# Altium PCB ver4.0.PcbDoc (part 2 of 2)
Units mil, origin at the board's own origin, x right, y up, seen from the top; angles counter-clockwise.
Board outline 2300 x 3750 mil, 2 copper layers (Top Layer, Bottom Layer); 43 components, 35 nets, 213 pads, 55 vias.
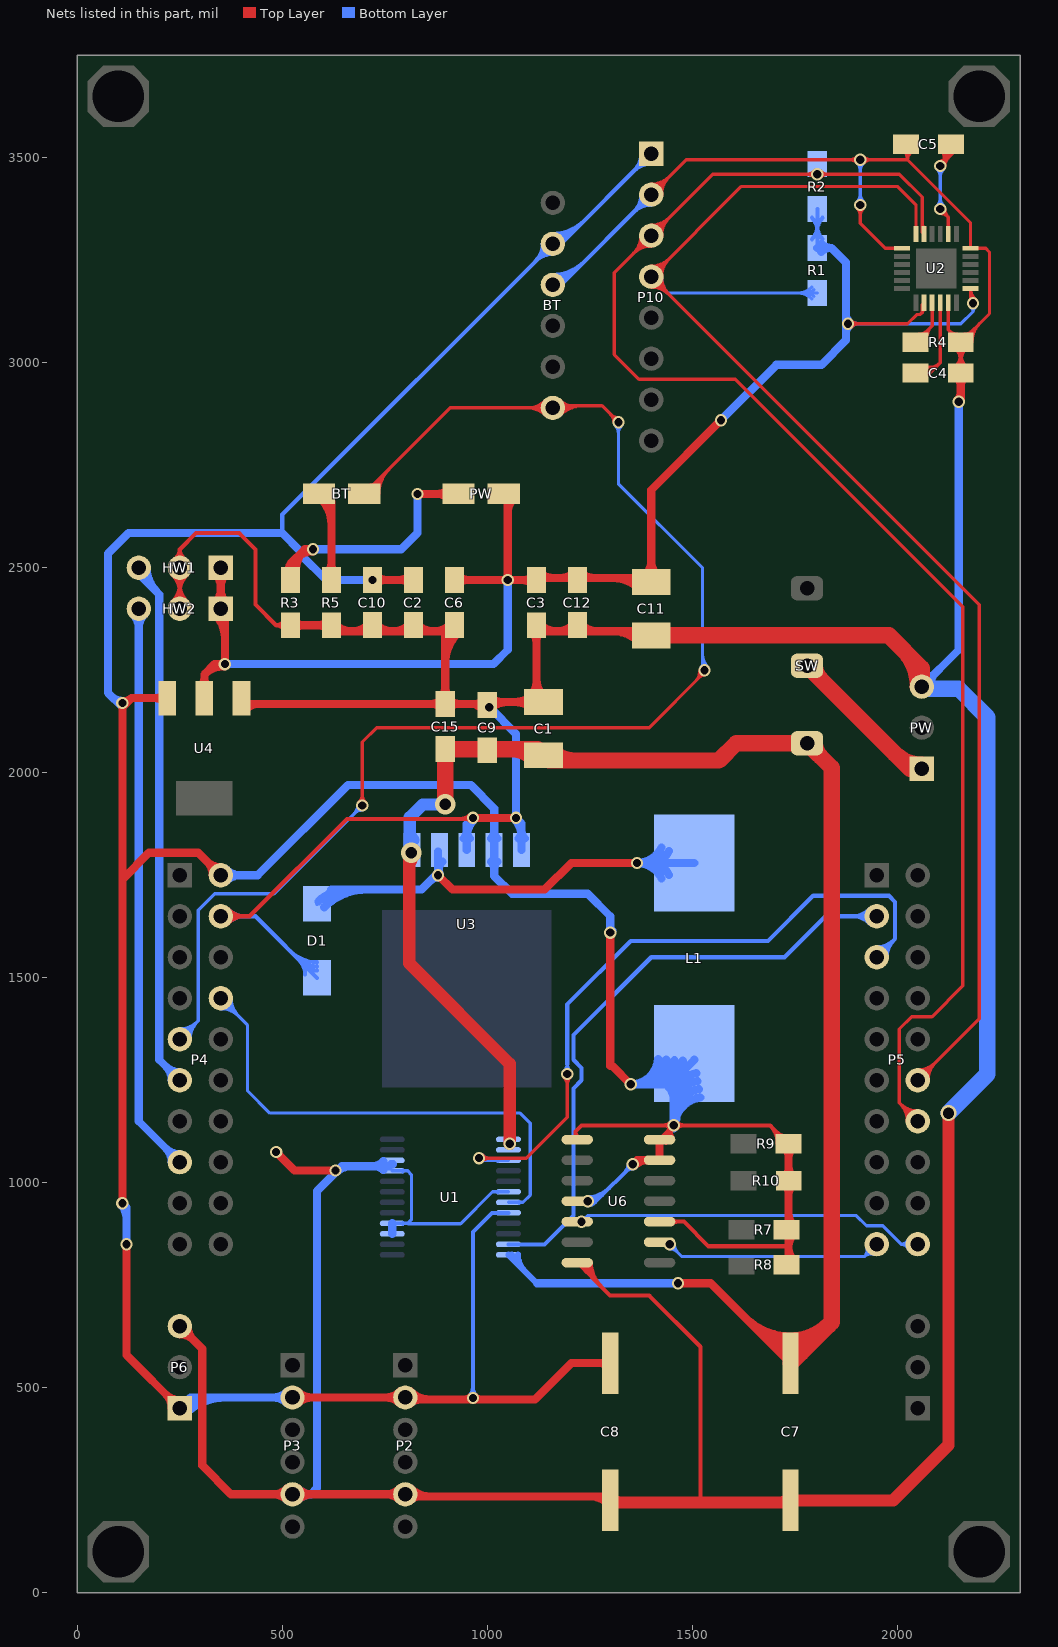
[diagram p2: the nets of this part, all layers, seen from the top]

## Via types
v1: diameter 30, hole 20, Top Layer to Bottom Layer, 52 vias
v2: diameter 50, hole 28, Top Layer to Bottom Layer, 2 vias
v3: diameter 40, hole 28, Top Layer to Bottom Layer, 1 vias

## Nets (pads, with @x,y where several pads share a name; then routed paths per layer and width w, separated by ;. In a path a pad name is that pad's centre, name@x,y a point inside that pad or via, vN(x,y) a via of type N, cw(c..) or ccw(c..) an arc to the next point about the centre after c; other vN are vias at no path point) (continued)
GND: BT.4 C1.2 C2.1 C3.2 C4.1 C5.1 C6.1 C7.2 C8.2 C9.1 C10.1 C11.2 C12.1 C15.2 D1.1 HW1.2 HW2.2 P2.5 P3.5 P4.4 P6.3@250,650 P10.2 PW.3 R3.2 R4.1 R5.2 U1.3 U1.4 U1.9 U1.10 U1.18 U2.1 U2.11 U2.18 U3.3 U3.5 U4.1 U6.7 | length 19056
  Top Layer w8: P10.2@1400,3410 1485,3495 v1(1910,3495) 2025,3495 ; P10.2@1400,3427.53 ccw(c1400,3469.84) 1429.92,3439.92 ccw(c1459.84,3410) P10.2@1417.53,3410 ; P10.2@1400,3435.53 ccw(c1400,3497.16) 1443.58,3453.58 ccw(c1487.16,3410) P10.2@1425.53,3410 ; v1@1902.22,3377.22 cw(c1883.44,3358.44) 1910,3358.44 cw(c1936.56,3358.44) v1@1917.78,3377.22 ; v1@1902.22,3487.22 ccw(c1883.44,3468.44) 1883.44,3495 ccw(c1883.44,3521.56) v1@1902.22,3502.78 ; v1@1917.78,3487.22 cw(c1936.56,3468.44) 1936.56,3495 cw(c1936.56,3521.56) v1@1917.78,3502.78 ; v1@1920,3385 v1(1910,3385) 1910,3340 1970.79,3279.21 U2.1@2011.34,3279.21 ; C5.1@2015,3519.13 cw(c1990.85,3494.98) 2025,3494.98 ; 2025,3494.8 cw(c2048.17,3494.8) C5.1@2037.72,3515.49 ; 2025,3507.81 cw(c2041.6,3507.81) C5.1@2034.11,3522.63 ; C5.1@2025,3545 2025,3495 ; U2.11@2124.53,3146.34 2124.53,3080.47 ; 2127.07,3077.93 ccw(c2147.13,3097.98) R4.1@2147.13,3069.62 ; R4.1@2129.03,3057.59 ccw(c2109.73,3065.68) 2124.53,3080.47 ; R4.1@2132.96,3072.04 cw(c2121.61,3060.7) R4.1@2136.41,3054.49 ; C4.1@2141.13,2988.87 ccw(c2107.63,3022.37) 2155,3022.37 ccw(c2202.37,3022.37) C4.1@2168.87,2988.87 ; R4.1@2141.13,3036.13 cw(c2107.63,3002.63) 2155,3002.63 cw(c2202.37,3002.63) R4.1@2168.87,3036.13 ; C4.1@2146.78,2983.22 ccw(c2126.94,3003.06) 2155,3003.06 ccw(c2183.06,3003.06) C4.1@2163.22,2983.22 ; R4.1@2146.78,3041.78 cw(c2126.94,3021.94) 2155,3021.94 cw(c2183.06,3021.94) R4.1@2163.22,3041.78 ; C4.1@2155,2975 R4.1@2155,3050 ; R4.1@2162.87,3069.62 ccw(c2162.87,3097.98) 2182.93,3077.93 ; R4.1@2174.5,3050 cw(c2221.56,3050) 2188.28,3083.28 ; R4.1@2182.5,3050 cw(c2248.88,3050) 2201.94,3096.94 ; 2025,3495 2178.66,3341.34 U2.18@2178.66,3279.21 2215.79,3279.21 2225,3270 2225,3120 R4.1@2155,3050 ; 2124.53,3080.47 R4.1@2155,3050
  Top Layer w10: HW2.2@232.66,2417.34 ccw(c190.79,2459.21) 250,2459.21 ccw(c309.21,2459.21) HW2.2@267.34,2417.34 ; HW1.2@232.66,2482.66 cw(c190.79,2440.79) 250,2440.79 cw(c309.21,2440.79) HW1.2@267.34,2482.66 ; HW1.2@236.71,2520.61 ccw(c220.99,2545) 250,2545 ; HW2.2@239.73,2410.27 ccw(c214.93,2435.07) 250,2435.07 ccw(c285.07,2435.07) HW2.2@260.27,2410.27 ; HW1.2@239.73,2489.73 cw(c214.93,2464.93) 250,2464.93 cw(c285.07,2464.93) HW1.2@260.27,2489.73 ; HW2.2@250,2400 HW1.2@250,2500 250,2545 ; HW1.2@263.29,2520.61 cw(c279.01,2545) 250,2545 ; P4.4@350,1650 420,1650 657.62,1887.62 962.62,1887.62 v1(965,1890) ; P4.4@360.27,1639.73 cw(c385.07,1614.93) 385.07,1650 cw(c385.07,1685.07) P4.4@360.27,1660.27 ; P4.4@367.34,1632.66 cw(c409.21,1590.79) 409.21,1650 cw(c409.21,1709.21) P4.4@367.34,1667.34 ; R3.2@504.5,2349.45 ccw(c485.24,2336.63) 485.24,2359.76 ; R3.2@504.5,2370.08 cw(c485.24,2382.9) 485.24,2359.76 ; R3.2@520,2359.76 485.24,2359.76 ; 935.11,1887.62 ccw(c935.11,1919.89) v1@957.93,1897.07 ; 946.61,1887.62 cw(c946.61,1871.61) v1@957.93,1882.93 ; U6.7@1219.61,805 1299.61,725 1395,725 1520,600 1520,220 ; U6.7@1222.99,805 ccw(c1231.17,805) U6.7@1225.39,799.22 ; U6.7@1232.99,805 ccw(c1265.31,805) 1242.46,782.15 ; U6.7@1242.99,805 ccw(c1299.45,805) 1259.53,765.08 ; U6.7@1252.99,805 ccw(c1333.59,805) 1276.6,748.01 ; 250,2545 290,2585 395,2585 435,2545 435,2410 485.24,2359.76
  Top Layer w20: P6.3@250,630.47 cw(c250,583.33) 283.34,616.66 cw(c316.67,650) P6.3@269.53,650 ; P6.3@250,650 305,595 305,310 374.96,240.04 P3.5@525,240.04 P2.5@800,240.04 805,235.04 1289.96,235.04 C8.2@1300,225 ; U4.1@408.79,2153.14 cw(c444.32,2117.61) 444.32,2167.85 ; U4.1@414.75,2167.85 C15.2@897.38,2167.85 ; v1(485,1075) 530,1030 v1(630,1030) ; P3.5@511.19,226.23 ccw(c477.86,192.9) 477.86,240.04 ccw(c477.86,287.18) P3.5@511.19,253.85 ; R3.2@520,2359.76 R5.2@620,2359.76 634.76,2345 C6.1@905,2345 ; R3.2@529.63,2350.13 cw(c552.89,2326.88) 552.89,2359.76 cw(c552.89,2392.65) R3.2@529.63,2369.4 ; P3.5@538.81,226.23 cw(c572.14,192.9) 572.14,240.04 cw(c572.14,287.18) P3.5@538.81,253.85 ; R5.2@610.37,2350.13 ccw(c587.11,2326.88) 587.11,2359.76 ccw(c587.11,2392.65) R5.2@610.37,2369.4 ; R5.2@629.63,2361.52 ccw(c669.52,2401.41) 669.52,2345 ; 669.91,2345 ccw(c669.91,2402.22) C10.1@710.37,2361.76 ; C10.1@729.63,2361.76 ccw(c770.09,2402.22) 770.09,2345 ; 769.91,2345 ccw(c769.91,2402.22) C2.1@810.37,2361.76 ; P2.5@786.19,226.23 ccw(c752.86,192.9) 752.86,240.04 ccw(c752.86,287.18) P2.5@786.19,253.85 ; P2.5@813.81,226.23 cw(c835.07,204.97) 835.07,235.04 ; P2.5@813.81,253.85 ccw(c859.21,299.25) 859.21,235.04 ; C2.1@829.63,2361.76 ccw(c870.09,2402.22) 870.09,2345 ; 869.91,2345 ccw(c869.91,2402.22) C6.1@910.37,2361.76 ; C15.2@887.75,2158.22 ccw(c864.5,2134.97) 864.5,2167.85 ccw(c864.5,2200.74) C15.2@887.75,2177.49 ; C15.2@887.75,2185.36 ccw(c864.5,2208.61) 897.38,2208.61 ccw(c930.27,2208.61) C15.2@907.01,2185.36 ; 897.38,2264.63 cw(c1007.49,2264.63) C6.1@929.63,2342.49 ; 897.38,2312.92 cw(c959.21,2312.92) C6.1@915.49,2356.64 ; C15.2@907.01,2158.22 cw(c930.27,2134.97) 930.27,2167.85 cw(c930.27,2200.74) C15.2@907.01,2177.49 ; C6.1@920,2360 C6.1@905,2345 ; 960.22,2167.85 cw(c960.22,2125.22) C9.1@990.37,2155.37 ; v1(965,1890) v1(1070,1890) ; 973.97,2167.85 cw(c973.97,2128.97) C9.1@1001.46,2156.46 ; 974,2167.85 ccw(c974,2191) C9.1@990.37,2174.63 ; C9.1@976.92,2163.13 ccw(c988.76,2183.64) C9.1@1002.17,2164.12 ; C9.1@997.38,2167.62 997.15,2167.85 C15.2@897.38,2167.85 ; C9.1@997.38,2172.62 C1.2@1137.38,2172.62 1120,2190 1120,2345 C12.1@1220,2345 ; C9.1@1008.54,2156.46 cw(c1047.53,2117.47) 1047.53,2172.62 ; C9.1@1009.63,2163.24 cw(c1032.27,2140.61) 1032.27,2172.62 ; C9.1@1009.63,2182.51 ccw(c1033.5,2206.38) 1033.5,2172.62 ; C1.2@1106.18,2157.42 ccw(c1069.48,2120.71) 1069.48,2172.62 ccw(c1069.48,2224.52) 1106.18,2187.82 ccw(c1072.81,2221.19) 1120,2221.19 ; C3.2@1110.37,2342.26 cw(c1087.11,2319) 1120,2319 cw(c1152.89,2319) C3.2@1129.63,2342.26 ; 1120,2227.86 ccw(c1176.62,2227.86) C1.2@1136.58,2187.82 ; C3.2@1129.63,2361.52 ccw(c1169.52,2401.41) 1169.52,2345 ; 1169.91,2345 ccw(c1169.91,2402.22) C12.1@1210.37,2361.76 ; C12.1@1220,2360 C12.1@1220,2345 ; C12.1@1229.63,2361.76 ccw(c1270.09,2402.22) 1270.09,2345 ; 1252.38,235.04 cw(c1252.38,177.38) C8.2@1293.15,218.15 ; 1307.95,2345 cw(c1307.95,2258.95) C11.2@1368.8,2319.8 ; C11.2@1380,2345 C12.1@1220,2345 ; C4.1@2145.37,2965.37 cw(c2122.11,2942.11) 2155,2942.11 cw(c2187.89,2942.11) C4.1@2164.63,2965.37 ; v1@2146.46,2908.54 ccw(c2125.86,2929.14) 2155,2929.14 ; v1@2155,2910 C4.1@2155,2975 ; C15.2@897.38,2167.85 897.38,2337.38 C6.1@905,2345
  Top Layer w30: C8.2@1300,220 1520,220 C7.2@1730,220 ; C8.2@1303.31,228.31 ccw(c1323.38,248.38) 1323.38,220 ; 1716.62,220 ccw(c1716.62,248.38) C7.2@1736.69,228.31 ; C7.2@1730,225 C7.2@1740,235 ; C7.2@1740,225 1990,225 2125,360 v3@2125,1165
  Top Layer w40: C11.2@1400,2335 1980,2335 2060,2255 PW.3@2060,2210 ; 2011.92,2303.08 cw(c1918.83,2210) PW.3@2050.47,2210
  Bottom Layer w8: U1.4@768.27,901.02 806.02,901.02 ; U1.9@768.27,1028.98 806.02,1028.98 815,1020 815,910 806.02,901.02 ; U1.4@793.93,898.98 cw(c798.87,894.05) 798.87,901.02 cw(c798.87,908) U1.4@793.93,903.07 ; U1.9@793.93,1026.93 cw(c798.87,1022) 798.87,1028.98 cw(c798.87,1035.95) U1.9@793.93,1031.02 ; U1.18@1026.07,975.75 ccw(c1021.13,970.82) 1021.13,977.8 ccw(c1021.13,984.77) U1.18@1026.07,979.84 ; U1.18@1051.73,977.8 1012.8,977.8 935,900 807.05,900 806.02,901.02 ; v1@1902.22,3392.78 ccw(c1883.44,3411.56) 1910,3411.56 ccw(c1936.56,3411.56) v1@1917.78,3392.78 ; v1@1902.22,3487.22 cw(c1883.44,3468.44) 1910,3468.44 cw(c1936.56,3468.44) v1@1917.78,3487.22 ; v1(1910,3495) v1(1910,3385) v1@1920,3385
  Bottom Layer w10: P4.4@350,1650 434.45,1650 D1.1@585,1499.45 ; P4.4@360.27,1639.73 cw(c385.07,1614.93) 385.07,1650 cw(c385.07,1685.07) P4.4@360.27,1660.27 ; P4.4@367.34,1632.66 cw(c409.21,1590.79) 409.21,1650 cw(c409.21,1709.21) P4.4@367.34,1667.34 ; 519.61,1564.84 ccw(c585,1630.24) D1.1@585,1537.76 ; 536.68,1547.77 ccw(c585,1596.09) D1.1@585,1527.76 ; 540.99,1543.46 cw(c505.84,1508.31) D1.1@555.55,1508.31 ; D1.1@553.75,1530.7 ccw(c585,1561.95) D1.1@585,1517.76 ; BT.4@1160,3190 1180,3190 P10.2@1400,3410 ; BT.4@1160,3194.53 ccw(c1160,3253.74) 1201.87,3211.87 ; BT.4@1160,3204.53 ccw(c1160,3287.88) 1218.94,3228.94 ; BT.4@1160,3214.53 ccw(c1160,3322.03) 1236.01,3246.01 ; P10.2@1375.47,3410 cw(c1316.26,3410) 1358.13,3368.13 cw(c1400,3326.26) P10.2@1400,3385.47 ; P10.2@1385.47,3410 cw(c1350.4,3410) 1375.2,3385.2 cw(c1400,3360.4) P10.2@1400,3395.47
  Bottom Layer w20: P3.5@525,240.04 P3.5@525,240.04 570,240 ; P3.5@539.24,226.68 cw(c570,197.83) 570,240 ; P3.5@539.28,253.36 ccw(c570,282) 570,240 ; 617.93,1012.93 ccw(c600.86,1030) v1@625,1030 ; v1(630,1030) 630,1025 585,980 585,255 570,240 ; v1@632.5,1027.5 645,1040 760,1040 765,1045 770,1045 ; v1@633.54,1026.46 cw(c666.21,993.79) 666.21,1040 ; 716.98,1040 ccw(c716.98,1082.23) U1.10@746.85,1052.37 ; 725.54,1040 cw(c725.54,1009.87) U1.9@746.85,1031.18 ; U1.3@768.27,875.43 U1.4@768.27,901.02 ; U3.3@942.46,1839.55 ccw(c924.24,1857.77) 950,1857.77 ccw(c975.76,1857.77) U3.3@957.54,1839.55 ; U3.3@950,1811.34 950,1875 v1(965,1890) ; U3.3@950,1841.72 cw(c1013.28,1841.72) v1@968.54,1886.46 ; v1(1005,2160) 1070,2095 v1(1070,1890) 1083.86,1876.14 U3.5@1083.86,1811.34 ; v1@1066.46,1886.46 cw(c1024.47,1844.47) U3.5@1083.86,1844.47 ; U3.5@1076.31,1839.55 ccw(c1058.1,1857.77) 1083.86,1857.77 ccw(c1109.62,1857.77) U3.5@1091.4,1839.55 ; PW.3@2060,2210 2150,2300 v1(2150,2905) ; PW.3@2060,2229.53 ccw(c2060,2276.67) 2093.34,2243.34 ccw(c2126.67,2210) PW.3@2079.53,2210
  Bottom Layer w40: PW.3@2060,2210 2065,2205 2150,2205 2220,2135 2220,1265 v3(2125,1170) ; PW.3@2066.74,2216.74 ccw(c2095.07,2245.07) 2095.07,2205
HONGWAI1: HW1.3 P4.11 | length 1430.9
  Bottom Layer w20: HW1.3@150,2500 150,2485 200,2435 200,1300 P4.11@250,1250 ; HW1.3@169.53,2500 ccw(c252.88,2500) 193.94,2441.06 ; P4.11@230.47,1250 ccw(c183.33,1250) 216.66,1283.34 ccw(c250,1316.67) P4.11@250,1269.53
HONGWAI2: HW2.3 P4.15 | length 1539.5
  Bottom Layer w20: HW2.3@136.19,2386.19 cw(c102.86,2352.86) 150,2352.86 cw(c197.14,2352.86) HW2.3@163.81,2386.19 ; HW2.3@150,2400 150,1150 P4.15@250,1050 ; P4.15@230.47,1050 ccw(c183.33,1050) 216.66,1083.34 ccw(c250,1116.67) P4.15@250,1069.53
NetC4_2: C4.2 U2.10 | length 400
  Top Layer w8: C4.2@2044.76,2975 2080,2975 ; C4.2@2050.71,2971.07 ccw(c2062.39,2994.85) 2081.12,2976.12 ; C4.2@2054.23,2978.25 ccw(c2067.59,3005.46) 2089.02,2984.02 ; C4.2@2057.76,2985.43 ccw(c2072.8,3016.06) 2096.93,2991.93 ; C4.2@2061.29,2992.61 ccw(c2078.01,3026.67) 2104.84,2999.84 ; C4.2@2071.22,2968.71 cw(c2080,2965.73) 2080,2975 ; C4.2@2071.22,2981.29 ccw(c2080,2984.27) 2080,2975 ; U2.10@2104.84,3146.34 2104.84,2999.84 ; 2080,2975 2104.84,2999.84
NetC5_2: C5.2 U2.20 | length 795.8
  Top Layer w8: v1@2102.72,3490.76 ccw(c2095.13,3526.5) 2126.77,3508.23 ; v1@2104.01,3490.96 ccw(c2102.17,3511.39) 2119.93,3501.13 ; v1@2104.38,3482.93 ccw(c2100.15,3502.86) 2117.79,3492.68 ; v1@2105,3364 cw(c2105,3337.44) 2123.78,3356.22 cw(c2142.56,3375) v1@2116,3375 ; v1(2105,3375) 2124.53,3355.47 U2.20@2124.53,3313.66 ; v1@2105,3491 ccw(c2105,3517.56) 2123.78,3498.78 ccw(c2142.56,3480) v1@2116,3480 ; v1@2106.6,3490.88 ccw(c2107.53,3497.24) 2113.1,3494.03 ccw(c2118.67,3490.81) v1@2113.63,3486.83 ; C5.2@2107.76,3521.1 cw(c2082.87,3502.13) v1(2105,3480) 2140.24,3515.24 C5.2@2140.24,3550 ; v1@2107.9,3490.61 ccw(c2110.56,3500.36) 2119.31,3495.31 ; v1@2111.47,3486.47 ccw(c2090.22,3507.73) C5.2@2114.12,3525.95 ; 2117.47,3496.86 ccw(c2133.46,3487.63) v1@2115.63,3482.85 ; 2117.94,3492.94 ccw(c2097.56,3513.33) C5.2@2120.48,3530.8 ; 2124.41,3499.41 ccw(c2104.9,3518.92) C5.2@2126.84,3535.65 ; 2130.88,3505.88 ccw(c2112.24,3524.52) C5.2@2133.21,3540.51 ; C5.2@2137.35,3512.35 ccw(c2119.59,3530.12) C5.2@2139.57,3545.36 ; v1@2115.63,3482.85 cw(c2125.65,3485.53) 2116.66,3490.73 ccw(c2125.65,3485.53) v1@2115.63,3482.85
  Bottom Layer w8: v1@2097.22,3382.78 ccw(c2078.44,3401.56) 2105,3401.56 ccw(c2131.56,3401.56) v1@2112.78,3382.78 ; v1@2097.22,3472.22 cw(c2078.44,3453.44) 2105,3453.44 cw(c2131.56,3453.44) v1@2112.78,3472.22 ; v1(2105,3375) v1(2105,3480)
NetD1_2: D1.2 L1.1 U3.2 | length 1570.2
  Top Layer w20: v1(880,1750) 915,1715 1140,1715 1205,1780 v1(1365,1780)
  Bottom Layer w10: D1.2@585,1680.55 D1.2@619.45,1715 ; U3.2@880,1808.27 U3.2@883.07,1811.34
  Bottom Layer w20: D1.2@588.15,1686.26 cw(c657.52,1616.89) 657.52,1715 ; D1.2@602.29,1672.12 cw(c705.8,1568.61) 705.8,1715 ; D1.2@619.45,1715 840,1715 880,1755 U3.2@880,1808.27 ; 862.93,1737.93 cw(c880,1720.86) v1@880,1745 ; v1@880,1757.5 cw(c916.24,1757.5) U3.2@890.61,1783.12 ; 882.46,1766.69 ccw(c900.52,1761.85) v1@884.33,1752.5 ; L1.1@1425.15,1742.01 ccw(c1365.01,1713.39) v1(1365,1780) ; L1.1@1425.15,1817.99 cw(c1365.01,1846.61) v1(1365,1780) ; L1.1@1443.21,1750.6 ccw(c1396.67,1728.46) 1396.67,1780 ccw(c1396.67,1831.54) L1.1@1443.21,1809.4 ; L1.1@1505,1780 v1(1365,1780)
NetD2_2: PW.2@929.76,2680 R3.1 | length 844.7
  Top Layer w20: R3.1@510.53,2487.67 ccw(c488.93,2510) 520,2510 ; R3.1@513.69,2476.94 cw(c559.99,2483.8) 526.89,2516.89 ; R3.1@520,2470 520,2510 ; R3.1@529.47,2487.67 cw(c551.07,2510) 520,2510 ; 532.32,2522.32 cw(c575,2479.64) v1@575,2540 ; R3.1@533.47,2479.87 cw(c608.95,2491.05) 555,2545 ; v1(575,2545) 555,2545 ; v1(830,2680) PW.2@929.76,2680 ; PW.2@904.79,2669.39 ccw(c879.18,2643.79) 879.18,2680 ccw(c879.18,2716.21) PW.2@904.79,2690.61 ; 520,2510 555,2545
  Bottom Layer w20: v1(575,2545) 790,2545 830,2585 v1(830,2680)
NetD3_2: BT.2@589.76,2680 R5.1 | length 431.2
  Top Layer w20: BT.2@589.76,2680 620,2649.76 ; BT.2@593.53,2669.39 cw(c529.62,2605.48) 620,2605.48 ; BT.2@602.62,2665.08 cw(c600.68,2645.85) 620,2645.85 ; BT.2@607.67,2683.54 cw(c577.9,2653.77) 620,2653.77 ; R5.1@610.37,2487.51 ccw(c587.11,2510.76) 620,2510.76 ccw(c652.89,2510.76) R5.1@629.63,2487.51 ; BT.2@617.08,2672.43 ccw(c633.22,2662.99) 620,2649.76 ; R5.1@620,2470 620,2649.76
NetR4_2: R4.2 U2.9 | length 206.9
  Top Layer w8: R4.2@2044.76,3050 2085.16,3090.39 ; R4.2@2052.64,3069.62 ccw(c2052.64,3097.98) 2072.69,3077.93 ; R4.2@2064.17,3051.43 cw(c2096.9,3055.5) 2073.58,3078.81 ; R4.2@2072.11,3052.42 cw(c2117.49,3058.06) 2085.16,3090.39 ; U2.9@2085.16,3146.34 2085.16,3090.39
PWMA: P5.3 U1.23 | length 1652.1
  Bottom Layer w10: U1.23@1051.73,849.84 1139.84,849.84 1205,915 1205,915.36 1210,920.36 1210,1230 1230,1250 1230,1280 1210,1300 1210,1360 1400,1550 1725,1550 1825,1650 P5.3@1950,1650 ; P5.3@1932.66,1632.66 ccw(c1890.79,1590.79) 1890.79,1650 ccw(c1890.79,1709.21) P5.3@1932.66,1667.34 ; P5.3@1939.73,1639.73 ccw(c1914.93,1614.93) 1914.93,1650 ccw(c1914.93,1685.07) P5.3@1939.73,1660.27
PWMB: P5.5 U1.15 | length 2011.2
  Top Layer w8: v1(980,1060) 1095,1060 1195,1160 v1(1195,1265) ; v1@987.78,1052.22 cw(c1006.56,1033.44) 1006.56,1060 cw(c1006.56,1086.56) v1@987.78,1067.78 ; v1@1187.22,1257.22 cw(c1168.44,1238.44) 1195,1238.44 cw(c1221.56,1238.44) v1@1202.78,1257.22
  Bottom Layer w8: v1(980,1060) 985,1060 990.43,1054.57 U1.15@1051.73,1054.57 ; v1@982.12,1062.12 ccw(c1000.36,1080.36) 1000.36,1054.57 ; v1@987.78,1067.78 ccw(c1019.67,1099.67) 1019.67,1054.57 ; U1.15@1026.07,1052.52 ccw(c1021.13,1047.59) 1021.13,1054.57 ccw(c1021.13,1061.54) U1.15@1026.07,1056.61 ; v1@1187.57,1273.11 ccw(c1172.09,1290) 1195,1290 ; v1(1195,1265) 1195,1290 ; v1@1202.43,1273.11 cw(c1217.91,1290) 1195,1290
  Bottom Layer w10: 1195,1290 1195,1435 1350,1590 1685,1590 1795,1700 1980,1700 1995,1685 1995,1595 P5.5@1950,1550 ; P5.5@1950,1564.53 ccw(c1950,1599.6) 1974.8,1574.8 ccw(c1999.6,1550) P5.5@1964.53,1550 ; P5.5@1950,1574.53 ccw(c1950,1633.74) 1991.87,1591.87 ccw(c2033.74,1550) P5.5@1974.53,1550
SCL: P5.14 P10.3 R2.1 U2.23 | length 4228.6
  Top Layer w8: P10.3@1374.47,3310 cw(c1312.84,3310) 1356.42,3266.42 cw(c1400,3222.84) P10.3@1400,3284.47 ; P10.3@1382.47,3310 cw(c1340.16,3310) 1370.08,3280.08 cw(c1400,3250.16) P10.3@1400,3292.47 ; P10.3@1400,3327.53 ccw(c1400,3369.84) 1429.92,3339.92 ccw(c1459.84,3310) P10.3@1417.53,3310 ; P10.3@1400,3335.53 ccw(c1400,3397.16) 1443.58,3353.58 ccw(c1487.16,3310) P10.3@1425.53,3310 ; v1@1797.22,3452.22 ccw(c1778.44,3433.44) 1778.44,3460 ccw(c1778.44,3486.56) v1@1797.22,3467.78 ; v1@1812.78,3452.22 cw(c1831.56,3433.44) 1831.56,3460 cw(c1831.56,3486.56) v1@1812.78,3467.78 ; P5.14@2024.47,1150 ccw(c1962.84,1150) 2006.42,1193.58 ccw(c2050,1237.16) P5.14@2050,1175.53 ; P5.14@2032.47,1150 ccw(c1990.16,1150) 2020.08,1179.92 ccw(c2050,1209.84) P5.14@2050,1167.53 ; P5.14@2050,1150 2005,1195 2005,1375 2035,1405 2085,1405 2160,1480 2160,2405 1605,2960 1370,2960 1310,3020 1310,3220 P10.3@1400,3310 1550,3460 2005,3460 2060.69,3404.31 2060.69,3318.44 U2.23@2065.47,3313.66 ; U2.23@2060.69,3324.26 ccw(c2062.29,3324.26) U2.23@2061.16,3323.13 ; 2060.69,3343.58 ccw(c2081.61,3343.58) U2.23@2066.82,3328.79
  other v1: 1805,3460
SDA: P5.12 P10.4 R1.1 U2.24 | length 4352.5
  Top Layer w8: P10.4@1400,3184.47 cw(c1400,3122.84) 1443.58,3166.42 cw(c1487.16,3210) 1425.53,3210 cw(c1487.16,3210) 1443.58,3253.58 cw(c1400,3297.16) P10.4@1400,3235.53 ; P10.4@1400,3192.47 cw(c1400,3150.16) 1429.92,3180.08 cw(c1459.84,3210) 1417.53,3210 cw(c1459.84,3210) 1429.92,3239.92 cw(c1400,3269.84) P10.4@1400,3227.53 ; U2.24@2045.79,3313.66 2045.79,3384.21 2000,3430 1620,3430 P10.4@1400,3210 2200,2410 2200,1400 P5.12@2050,1250 ; P5.12@2050,1267.53 ccw(c2050,1309.84) 2079.92,1279.92 ccw(c2109.84,1250) P5.12@2067.53,1250 ; P5.12@2050,1275.53 ccw(c2050,1337.16) 2093.58,1293.58 ccw(c2137.16,1250) P5.12@2075.53,1250
  Bottom Layer w8: P10.4@1400,3210 1440,3170 ; P10.4@1401.09,3192.51 cw(c1403.23,3158.31) 1427.46,3182.54 cw(c1451.69,3206.77) P10.4@1417.49,3208.91 ; P10.4@1401.59,3184.52 cw(c1404.71,3134.71) 1440,3170 ; P10.4@1425.48,3208.41 ccw(c1475.29,3205.29) 1440,3170 ; R1.1@1791.13,3156.13 ccw(c1757.63,3122.63) 1757.63,3170 ccw(c1757.63,3217.37) R1.1@1791.13,3183.87 ; R1.1@1796.78,3161.78 ccw(c1776.94,3141.94) 1776.94,3170 ccw(c1776.94,3198.06) R1.1@1796.78,3178.22 ; R1.1@1805,3170 1440,3170
STATE: BT.1 P4.9 | length 4292.3
  Top Layer w8: v1@687.22,1927.78 ccw(c668.44,1946.56) 695,1946.56 ccw(c721.56,1946.56) v1@702.78,1927.78 ; v1(695,1920) 695,2075 730,2110 1395,2110 v1@1525,2240 ; BT.1@700,2680 910,2890 BT.1@1160,2890 1165,2895 1280,2895 v1(1320,2855) ; BT.1@714.37,2701 ccw(c714.37,2717.01) 725.69,2705.69 ; BT.1@719.37,2680 cw(c766.13,2680) 733.07,2713.07 ; BT.1@727.37,2680 cw(c793.45,2680) 746.72,2726.72 ; BT.1@735.37,2680 cw(c820.76,2680) 760.38,2740.38 ; BT.1@1141.95,2871.95 ccw(c1098.37,2828.37) 1098.37,2890 ccw(c1098.37,2951.63) BT.1@1141.95,2908.05 ; BT.1@1147.61,2877.61 ccw(c1117.68,2847.68) 1117.68,2890 ccw(c1117.68,2932.32) BT.1@1147.61,2902.39 ; BT.1@1166.74,2883.26 cw(c1195.07,2854.93) 1195.07,2895 ; BT.1@1172.39,2877.61 cw(c1214.39,2835.61) 1214.39,2895 ; BT.1@1172.39,2902.39 ccw(c1190.24,2920.24) 1190.24,2895 ; BT.1@1178.05,2871.95 cw(c1233.7,2816.3) 1233.7,2895 ; BT.1@1178.05,2908.05 ccw(c1209.56,2939.56) 1209.56,2895 ; v1@1309,2855 ccw(c1282.44,2855) 1301.22,2873.78 ccw(c1320,2892.56) v1@1320,2866 ; 1507.69,2222.69 ccw(c1480.37,2250) v1@1519,2250 ; 1519.76,2234.76 cw(c1530,2224.51) v1@1530,2239 ; 1521.34,2236.34 ccw(c1507.69,2250) v1@1527,2250
  Bottom Layer w8: P4.9@250,1350 295,1395 295,1665 335,1705 480,1705 v1(695,1920) ; P4.9@250,1367.53 ccw(c250,1409.84) 279.92,1379.92 ccw(c309.84,1350) P4.9@267.53,1350 ; P4.9@250,1375.53 ccw(c250,1437.16) 293.58,1393.58 ccw(c337.16,1350) P4.9@275.53,1350 ; v1@684,1920 cw(c657.44,1920) 676.22,1901.22 cw(c695,1882.44) v1@695,1909 ; v1@1312.22,2847.22 cw(c1293.44,2828.44) 1320,2828.44 cw(c1346.56,2828.44) v1@1327.78,2847.22 ; v1(1320,2855) 1320,2705 1525,2500 v1@1525,2240 ; v1@1522.22,2257.78 ccw(c1515.51,2264.49) 1525,2264.49 ; 1525,2269.31 ccw(c1549.31,2269.31) v1@1532.12,2252.12 ; 1525,2288.63 ccw(c1568.63,2288.63) v1@1537.78,2257.78
  other v1: 1530,2250
STBY: P4.8 U1.19 | length 1384.9
  Bottom Layer w8: P4.8@350,1424.47 cw(c350,1362.84) 393.58,1406.42 cw(c437.16,1450) P4.8@375.53,1450 ; P4.8@350,1432.47 cw(c350,1390.16) 379.92,1420.08 cw(c409.84,1450) P4.8@367.53,1450 ; P4.8@350,1450 415,1385 415,1225 470,1170 1080,1170 1105,1145 1105,970 1087.2,952.2 U1.19@1051.73,952.2 ; U1.19@1077.4,950.16 cw(c1082.33,945.23) 1082.33,952.2 cw(c1082.33,959.18) U1.19@1077.4,954.25
VCC_3.3V: C3.1 C6.2 C11.1 C12.2 HW1.1 HW2.1 PW.1@1040,2680 R1.2 R2.2 U2.8 U2.13 U4.2 | length 4936.7
  Top Layer w8: v1(1880,3095) 2025,3095 2047.65,3117.65 2055.42,3117.65 2060.69,3122.93 2060.69,3141.56 U2.8@2065.47,3146.34 ; v1@1887.78,3087.22 cw(c1906.56,3068.44) 1906.56,3095 cw(c1906.56,3121.56) v1@1887.78,3102.78 ; 2058.79,3121.02 ccw(c2047.25,3132.56) U2.8@2063.57,3132.56 ; 2060.69,3121.81 cw(c2070.78,3121.81) U2.8@2066.32,3130.85 ; 2060.69,3122.93 ccw(c2053.28,3130.34) U2.8@2063.6,3132.22 ; U2.8@2060.69,3134.68 cw(c2064.43,3134.68) U2.8@2062.77,3138.02 ; 2178.66,3164.27 ccw(c2200.22,3164.27) v1@2186.86,3147.35 ; v1(2185,3145) 2178.66,3151.34 U2.13@2178.66,3180.79 ccw(c2213.26,3180.79) v1@2191.82,3153.63
  Top Layer w20: U4.2@301.76,2210.96 ccw(c281.87,2230.85) 310,2230.85 ccw(c338.13,2230.85) U4.2@318.24,2210.96 ; U4.2@310,2182.05 310,2240 ; HW2.1@336.19,2386.19 cw(c278.71,2328.71) 360,2328.71 ; HW2.1@336.19,2413.81 ccw(c302.86,2447.14) 350,2447.14 ccw(c397.14,2447.14) HW2.1@363.81,2413.81 ; HW1.1@336.19,2486.19 cw(c302.86,2452.86) 350,2452.86 cw(c397.14,2452.86) HW1.1@363.81,2486.19 ; HW1.1@350,2500 HW2.1@350,2400 360,2390 v1(360,2265) 335,2265 310,2240 ; v1@359.89,2260 ccw(c358.33,2191.68) 310,2240 ; C6.2@920,2470.24 v1@1049.76,2470.24 ; C6.2@929.63,2460.6 cw(c952.89,2437.35) 952.89,2470.24 cw(c952.89,2503.12) C6.2@929.63,2479.87 ; PW.1@1040,2680 1050,2670 v1@1050,2470.24 ; PW.1@1043.76,2669.39 cw(c1028.71,2654.34) 1050,2654.34 ; v1(1050,2470) C3.1@1120,2470 ; 1050,2633.24 cw(c1101.13,2633.24) PW.1@1064.98,2669.39 ; C3.1@1110.37,2460.37 ccw(c1087.11,2437.11) 1087.11,2470 ccw(c1087.11,2502.89) C3.1@1110.37,2479.63 ; C3.1@1120,2475 C11.1@1380,2475 ; C3.1@1129.63,2468.24 cw(c1145.95,2451.93) 1145.95,2475 ; C3.1@1129.63,2487.51 ccw(c1159.82,2517.7) 1159.82,2475 ; 1179.6,2475 ccw(c1179.6,2518.51) C12.2@1210.37,2487.74 ; 1194.62,2475 cw(c1194.62,2452.73) C12.2@1210.37,2468.48 ; C12.2@1229.63,2468.48 cw(c1245.38,2452.73) 1245.38,2475 ; C12.2@1229.63,2487.74 ccw(c1260.4,2518.51) 1260.4,2475 ; 1307.95,2475 cw(c1307.95,2388.95) C11.1@1368.8,2449.8 ; C11.1@1384.8,2480.2 ccw(c1348.09,2516.91) 1400,2516.91 ccw(c1451.91,2516.91) C11.1@1415.2,2480.2 ; C11.1@1400,2465 1400,2690 v1(1570,2860)
  Bottom Layer w8: v1@1875,3095 2155,3095 2185,3125 ; v1@1887.78,3087.22 cw(c1906.56,3068.44) 1906.56,3095 cw(c1906.56,3121.56) v1@1887.78,3102.78 ; v1@2179.11,3135.71 cw(c2172.32,3125) 2185,3125 ; v1(2185,3145) 2185,3125 ; v1@2190.89,3135.71 ccw(c2197.68,3125) 2185,3125
  Bottom Layer w10: R1.2@1791.83,3301.28 ccw(c1760.04,3333.07) 1805,3333.07 ccw(c1849.96,3333.07) R1.2@1818.17,3301.28 ; R2.2@1791.83,3353.72 cw(c1760.04,3321.93) 1805,3321.93 cw(c1849.96,3321.93) R2.2@1818.17,3353.72 ; R1.2@1805,3280.24 R2.2@1805,3374.76
  Bottom Layer w20: v1(360,2265) 1015,2265 1050,2300 v1(1050,2470) ; v1(1570,2860) 1705,2995 1815,2995 1875,3055 1875,3095 1875,3245 1839.76,3280.24 R1.2@1805,3280.24 ; R1.2@1814.63,3270.6 cw(c1837.89,3247.35) 1837.89,3280.24 cw(c1837.89,3313.12) R1.2@1814.63,3289.87 ; 1875,3070.86 cw(c1904.14,3070.86) v1@1883.54,3091.46 ; 1875,3119.14 ccw(c1904.14,3119.14) v1@1883.54,3098.54
VCC_5V: BT.5 C2.2 C8.1 C10.2 L1.2 P2.2 P3.2 P4.2 P6.1@250,450 P10.1 R7.1 R8.1 R9.1 R10.2 U1.20 U3.4 U4.3 U6.1 U6.4 U6.10 U6.13 U6.14 | length 13160.9
  Top Layer w10: U6.1@1219.61,1105 1215,1109.61 1215,1125 ; U6.1@1223.07,1110.87 cw(c1231.41,1125) 1215,1125 ; U6.10@1420.39,905 1480,905 1540,845 1735,845 ; U6.14@1420.39,1105 v1@1455.39,1140 ; U6.14@1436.12,1097.5 cw(c1452.59,1108.88) 1438.43,1123.04 ; 1437.65,1122.26 ccw(c1419.91,1140) v1@1445,1140 ; 1438.6,1123.21 cw(c1455,1106.81) v1@1455,1130 ; 1440.37,1120.18 cw(c1457.56,1110.25) v1@1455.86,1130.04 ; 1443.87,1126.25 ccw(c1431.13,1133.61) v1@1445.34,1137.41 ; U6.14@1444.34,1103.19 cw(c1462.62,1115.81) v1@1446.91,1131.52 ; v1@1447.93,1132.93 ccw(c1430.86,1115.86) 1430.86,1140 ccw(c1430.86,1164.14) v1@1447.93,1147.07 ; U6.10@1451.78,900.18 cw(c1463.41,888.56) 1463.41,905 cw(c1463.41,921.44) U6.10@1451.78,909.82 ; U6.14@1452.57,1108.87 cw(c1472.65,1122.74) v1@1455.39,1140 ; v1@1462.07,1132.93 cw(c1479.14,1115.86) 1479.14,1140 cw(c1479.14,1164.14) v1@1462.07,1147.07 ; 1706.98,1123.02 cw(c1679.15,1095.19) R9.1@1718.5,1095.03 ; R9.1@1708.5,1095.07 ccw(c1645.33,1095.33) 1690,1140 ; 1708.78,1121.22 ccw(c1727.13,1139.57) R9.1@1727.13,1113.62 ; R9.1@1735,1095 1690,1140 ; 1215,1125 1230,1140 v1(1455,1140) v1@1455.39,1140 ; v1@1455.39,1140 1690,1140
  Top Layer w20: v1(110,950) 110,1740 ; v1@110.71,2174.95 ccw(c114.29,2199.8) 132.05,2182.05 ; v1@120,840 120,580 P6.1@250,450 ; U4.3@211.21,2173.81 ccw(c191.31,2153.91) 191.31,2182.05 ccw(c191.31,2210.18) U4.3@211.21,2190.29 ; U4.3@219.45,2182.05 132.05,2182.05 ; P6.1@230.47,450 ccw(c183.33,450) 216.66,483.34 ccw(c250,516.67) P6.1@250,469.53 ; P4.2@330.47,1750 ccw(c283.33,1750) 316.66,1783.34 ccw(c350,1816.67) P4.2@350,1769.53 ; P4.2@350,1750 295,1805 175,1805 110,1740 ; P3.2@525,476.26 P2.2@800,476.26 ; P3.2@538.81,462.45 cw(c572.14,429.12) 572.14,476.26 cw(c572.14,523.4) P3.2@538.81,490.07 ; v1(720,2470.24) C2.2@820,2470.24 ; C10.2@729.63,2460.6 cw(c752.89,2437.35) 752.89,2470.24 cw(c752.89,2503.12) C10.2@729.63,2479.87 ; P2.2@786.19,462.45 ccw(c752.86,429.12) 752.86,476.26 ccw(c752.86,523.4) P2.2@786.19,490.07 ; P2.2@800,471.26 1116.26,471.26 1205,560 C8.1@1300,560 ; C2.2@810.37,2460.6 ccw(c787.11,2437.35) 787.11,2470.24 ccw(c787.11,2503.12) C2.2@810.37,2479.87 ; P2.2@813.81,462.45 cw(c835.07,441.19) 835.07,471.26 ; P2.2@813.81,490.07 ccw(c859.21,535.47) 859.21,471.26 ; 943.9,471.26 ccw(c943.9,496.1) v1@961.46,478.54 ; v1@968.54,478.54 ccw(c986.1,496.1) 986.1,471.26 ; C8.1@1293.15,553.15 ccw(c1276.62,536.62) 1276.62,560 ccw(c1276.62,583.38) C8.1@1293.15,566.85 ; v1(1300,1610) 1300,1285 1305,1285 v1(1350,1240) ; v1@1358.54,1041.46 cw(c1391.21,1008.79) U6.13@1391.21,1055 ; v1@1365,1055 U6.13@1420.39,1055 U6.14@1420.39,1105 ; R9.1@1725.37,1085.37 cw(c1702.11,1062.11) 1735,1062.11 cw(c1767.89,1062.11) R9.1@1744.63,1085.37 ; R10.2@1725.6,995.37 cw(c1702.92,972.68) 1735,972.68 ; R10.2@1725.6,1014.63 ccw(c1702.92,1037.32) 1735,1037.32 ; R8.1@1728.24,809.63 ccw(c1711.93,825.95) 1735,825.95 ; R7.1@1728.24,875.37 cw(c1711.93,859.05) 1735,859.05 ; R7.1@1728.24,894.63 ccw(c1711.93,910.95) 1735,910.95 ; R8.1@1735,805 1735,845 R9.1@1735,1095 ; 1735,839.82 ccw(c1777.7,839.82) R8.1@1747.51,809.63 ; 1735,845.18 cw(c1777.7,845.18) R7.1@1747.51,875.37 ; 1735,924.82 ccw(c1777.7,924.82) R7.1@1747.51,894.63 ; 1735,971.54 cw(c1768.69,971.54) R10.2@1744.87,995.37 ; 1735,1038.46 ccw(c1768.69,1038.46) R10.2@1744.87,1014.63 ; 110,1740 110,2160 132.05,2182.05
  Bottom Layer w10: 500,2585 500,2630 BT.5@1160,3290 1180,3290 P10.1@1400,3510 ; v1@957.93,482.07 ccw(c940.86,499.14) 965,499.14 ccw(c989.14,499.14) v1@972.07,482.07 ; v1(965,475) 965,880 1011.61,926.61 U1.20@1051.73,926.61 ; BT.5@1135.47,3290 cw(c1076.26,3290) 1118.13,3248.13 cw(c1160,3206.26) BT.5@1160,3265.47 ; BT.5@1145.47,3290 cw(c1110.4,3290) 1135.2,3265.2 cw(c1160,3240.4) BT.5@1160,3275.47 ; BT.5@1160,3294.53 ccw(c1160,3353.74) 1201.87,3311.87 ; BT.5@1160,3304.53 ccw(c1160,3387.88) 1218.94,3328.94 ; BT.5@1160,3314.53 ccw(c1160,3422.03) 1236.01,3346.01 ; v1@1245,945 ccw(c1245,969.14) 1262.07,952.07 ; v1@1245,965 ccw(c1245,1037.43) 1296.21,986.21 ; v1@1253,949 cw(c1265,940) 1265,955 ; v1@1253,961 ccw(c1265,970) 1265,955 ; 1279.14,969.14 cw(c1245,1003.28) v1(1245,955) 1265,955 ; v1@1345,1045 cw(c1320.86,1045) 1337.93,1027.93 cw(c1355,1010.86) v1@1355,1035 ; v1(1355,1045) 1265,955 ; P10.1@1375.47,3510 cw(c1316.26,3510) 1358.13,3468.13 cw(c1400,3426.26) P10.1@1400,3485.47 ; P10.1@1385.47,3510 cw(c1350.4,3510) 1375.2,3485.2 cw(c1400,3460.4) P10.1@1400,3495.47
  Bottom Layer w20: 84.39,2185.61 ccw(c110,2211.21) v1@110,2175 ; v1@106.46,946.46 cw(c73.79,913.79) 120,913.79 ; v1(110,950) 120,940 v1(120,850) ; v1(110,2170) 110,2160 75,2195 75,2535 125,2585 500,2585 545,2540 545,2532.57 607.34,2470.24 v1(720,2470.24) ; P6.1@249.67,450.33 cw(c312.26,387.74) 312.26,476.26 ; P6.1@250,450 276.26,476.26 P3.2@525,476.26 ; P6.1@263.81,436.19 cw(c360.54,339.46) 360.54,476.26 ; P4.2@350,1750 440,1750 660,1970 960,1970 1016.93,1913.07 U3.4@1016.93,1811.34 1016.93,1748.07 1060,1705 1245,1705 1300,1650 v1(1300,1610) v1@1305,1615 ; P4.2@363.81,1736.19 cw(c397.14,1702.86) 397.14,1750 cw(c397.14,1797.14) P4.2@363.81,1763.81 ; P3.2@511.19,462.45 ccw(c477.86,429.12) 477.86,476.26 ccw(c477.86,523.4) P3.2@511.19,490.07 ; U3.4@1009.39,1783.12 cw(c991.17,1764.91) 1016.93,1764.91 cw(c1042.69,1764.91) U3.4@1024.47,1783.12 ; U3.4@1009.39,1839.55 ccw(c991.17,1857.77) 1016.93,1857.77 ccw(c1042.69,1857.77) U3.4@1024.47,1839.55 ; 1371.57,1240 ccw(c1371.57,1305.38) L1.2@1436.77,1300.46 ; 1393.14,1240 ccw(c1393.14,1303.76) L1.2@1456.71,1298.96 ; L1.2@1414.7,1240 ccw(c1414.7,1302.13) L1.2@1476.66,1297.45 ; L1.2@1416.83,1301.97 cw(c1350.01,1307.01) v1(1350,1240) 1445,1240 L1.2@1455,1250 ; L1.2@1442.47,1232.79 cw(c1412.23,1202.55) L1.2@1455,1202.55 ; v1@1452.5,1144.33 ccw(c1443,1160.79) 1461.35,1155.87 ; v1@1455,1132.16 cw(c1531.94,1132.16) L1.2@1519.41,1208.07 ; v1(1455,1140) L1.2@1455,1250 ; 1455,1155.73 cw(c1528.05,1155.73) L1.2@1516.15,1227.8 ; 1455,1179.3 cw(c1524.16,1179.3) L1.2@1512.89,1247.54 ; L1.2@1455,1202.88 cw(c1520.26,1202.88) L1.2@1509.63,1267.27 ; L1.2@1505,1300 L1.2@1455,1250
VIN: C1.1 C7.1 C9.2 C15.1 SW.3 U1.13 U1.14 U1.24 U3.1 | length 5111.8
  Top Layer w20: v1(1465,755) 1545,755 C7.1@1740,560 ; 1629.04,670.96 ccw(c1740,781.92) C7.1@1740,625 ; 1663.18,636.82 ccw(c1740,713.64) C7.1@1740,605 ; 1697.32,602.68 ccw(c1740,645.36) C7.1@1740,585 ; C7.1@1731.46,568.54 ccw(c1740,577.07) C7.1@1740,565
  Top Layer w30: 810,1768.79 cw(c851.21,1768.79) v2@822.07,1797.93 ; v2(815,1805) 810,1800 810,1535 1055,1290 v1(1055,1095)
  Top Layer w40: v2(897.38,1922.62) C15.1@897.38,2057.62 897.62,2057.38 997.38,2057.38 1122.62,2057.38 C1.1@1137.38,2042.62 1150,2030 1565,2030 1607.05,2072.05 SW.3@1780,2072.05 1840,2012.05 1840,660 C7.1@1740,560 ; 1057.98,2057.38 cw(c1057.98,1979.21) C1.1@1113.25,2034.49 ; C1.1@1161.51,2050.75 ccw(c1211.61,2100.84) 1211.61,2030 ; C7.1@1740,575 ccw(c1740,611.21) 1765.61,585.61 ; C7.1@1740,615 ccw(c1740,747.78) 1833.89,653.89 ; SW.3@1799.37,2072.05 ccw(c1846.13,2072.05) 1813.07,2038.98
  Bottom Layer w15: U1.24@1051.73,824.25 1120.98,755 ; U1.24@1059.74,824.25 ccw(c1079.09,824.25) 1065.41,810.57 ; U1.24@1074.74,824.25 ccw(c1130.3,824.25) 1091.02,784.97
  Bottom Layer w20: 1120.98,755 v1(1465,755)
  Bottom Layer w30: U3.1@811.14,1811.34 811.14,1891.14 842.62,1922.62 v2(897.38,1922.62) ; U3.1@811.14,1838.46 ccw(c848.46,1838.46) U3.1@822.07,1812.07 ; 811.14,1857.77 ccw(c841.9,1857.77) U3.1@820.15,1836.02
VIN_SW: PW.1@2060,2010 SW.2 | length 493.7
  Top Layer w40: SW.2@1780,2261.02 2031.02,2010 PW.1@2060,2010 ; SW.2@1799.37,2261.02 ccw(c1846.13,2261.02) 1813.07,2227.96 ; 1994.27,2046.75 ccw(c2060,2112.48) PW.1@2060,2019.53
XIANGWEI1: P5.20 U6.5 | length 897.4
  Bottom Layer w8: v1(1230,905) 1245,920 1900,920 1925,895 1965,895 2010,850 ; P5.20@2026.85,839.25 ccw(c2010,831.43) 2010,850 ; P5.20@2026.85,860.75 cw(c2010,868.57) 2010,850 ; P5.20@2050,850 2010,850
XIANGWEI2: P5.19 U6.9 | length 620.3
  Bottom Layer w8: v1@1445,839 cw(c1445,812.44) 1463.78,831.22 cw(c1482.56,850) v1@1456,850 ; v1(1445,850) 1475,820 1920,820 ; P5.19@1925.6,842.51 cw(c1904.1,835.9) 1920,820 ; P5.19@1942.51,825.6 ccw(c1935.9,804.1) 1920,820 ; P5.19@1950,850 1920,820
pads on no net: BT.6 P4.1 P4.3 P4.6 P4.13 P5.1 P5.2 P5.4 P5.6 P5.7 P5.8 P5.9 P5.10 P5.11 P5.13 P5.15 P5.16 P5.17 P5.18 P6.1@2050,450 P6.2 P6.3@2050,650 P10.5 P10.6 P10.7 P10.8 PW.2@2060,2110 SW.1 U2.2 U2.3 U2.4 U2.5 U2.6 U2.7 U2.12 U2.14 U2.15 U2.16 U2.17 U2.19 U2.21 U2.22 U2.25 U3.6 U4.4 U6.6 U6.8

## Polygon pours and split planes (outlines as drawn)
GND on Top Layer "Top Layer-No Net" (solid, pour order 9): 0,3750 2300,3750 2300,0 0,0 0,3750
GND on Bottom Layer "Top Layer-No Net" (solid, pour order 11): 0,3750 2300,3750 2300,0 0,0 0,3750

## Keep-outs
Keep-Out Layer:
  the board outline again, w40

## Silkscreen, mask and mechanical layers (free items; w line width, h text height)
Top Overlay:
  text "V4.0" at 1400,1600 h60